# Altium PCB Adafruit PCA9685 rev C.PcbDoc
Units mil, origin at the board's own origin, x right, y up, seen from the top; angles counter-clockwise.
Board outline 2450 x 1000 mil, 2 copper layers (Top, Bottom), stack 61.811 mil thick; 40 components, 46 nets, 175 pads, 27 vias.
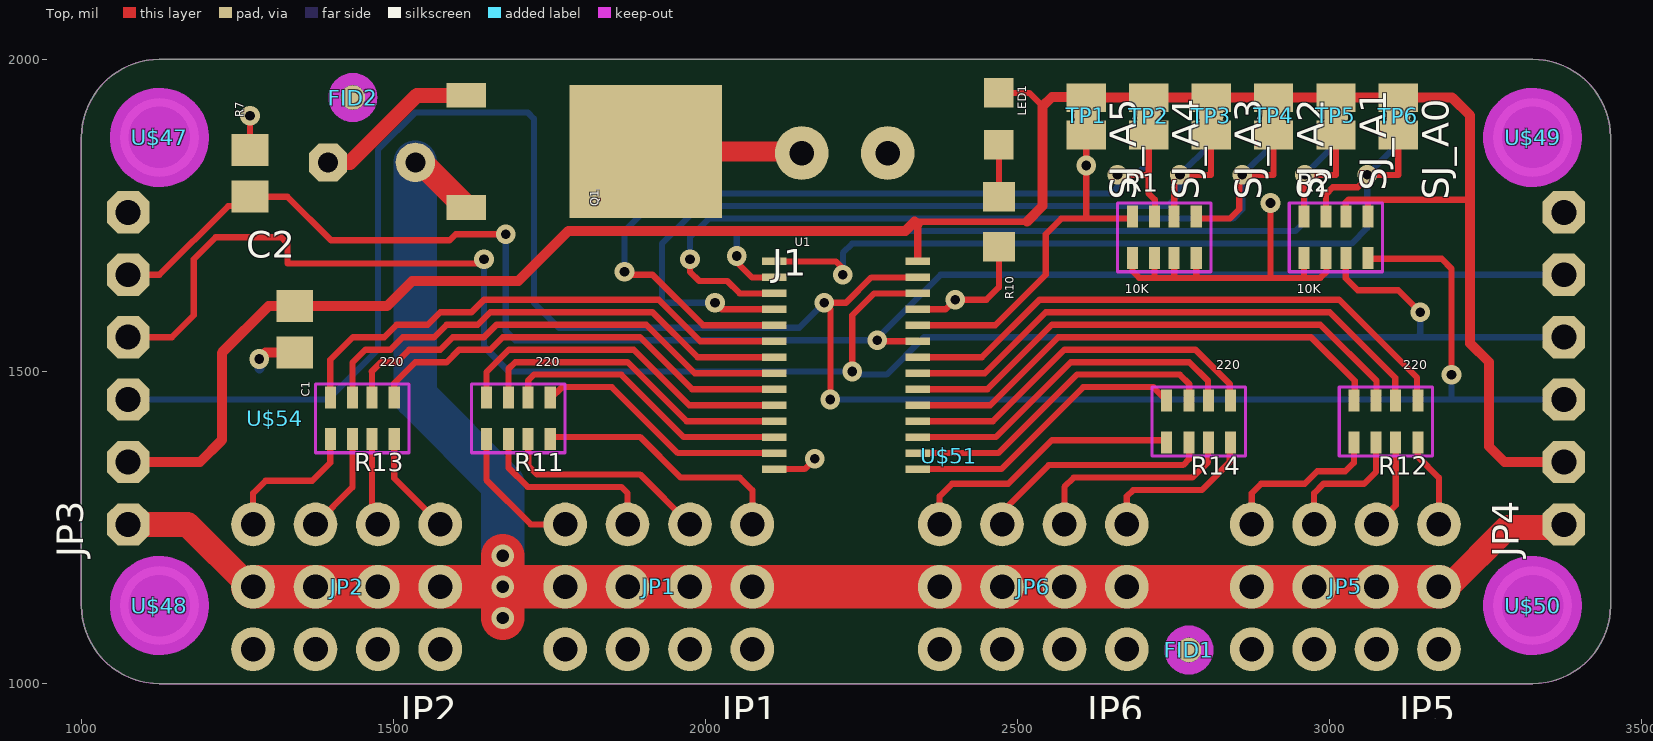
[diagram p0: Top view]
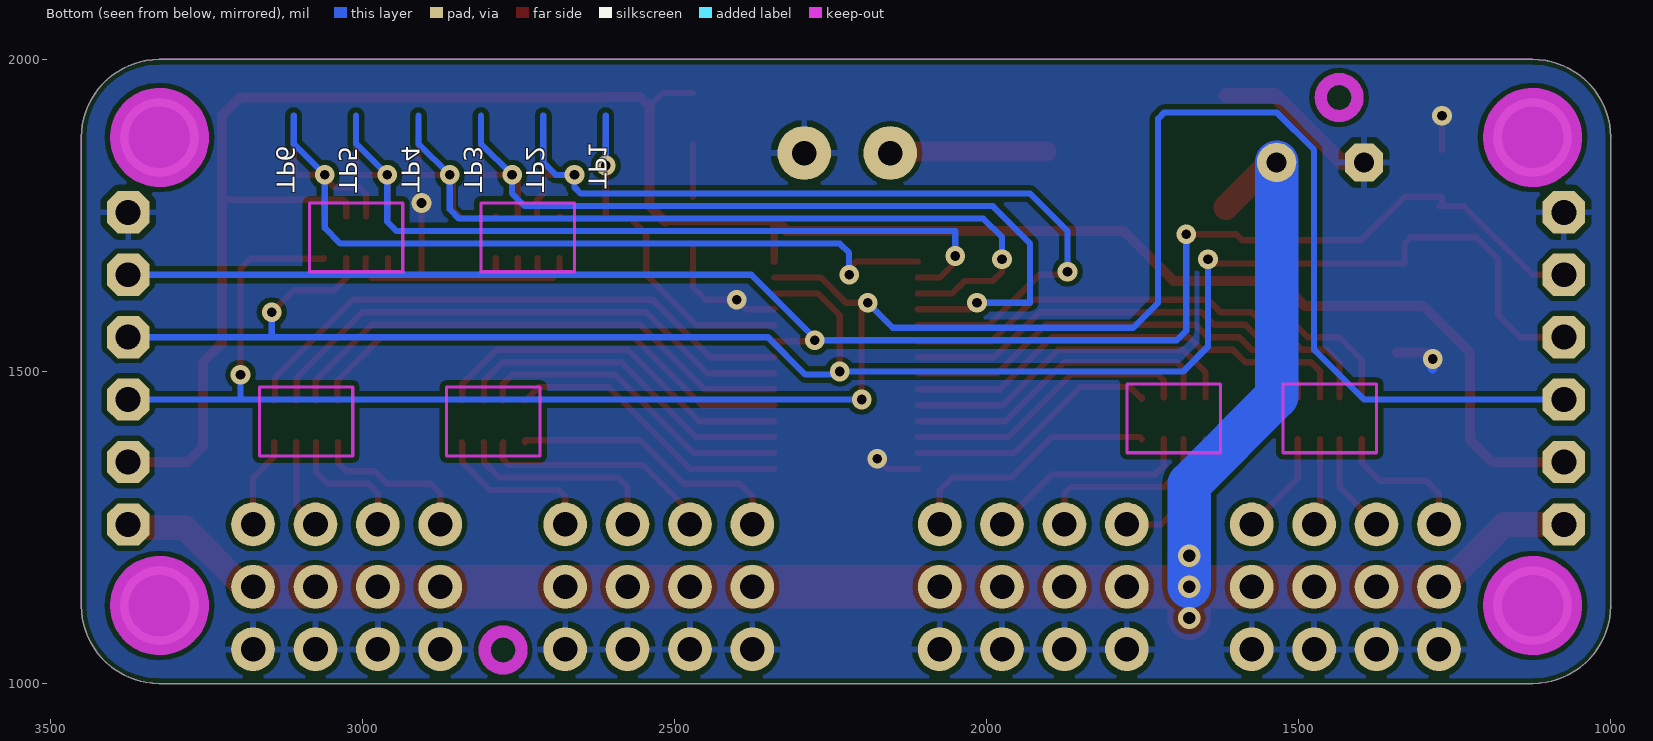
[diagram p1: Bottom view, seen from below]

## Layer stack, top to bottom
Top Solder: solder mask 0.4, Solder Resist, Dk 3.5
Top: signal copper 1.378
Dielectric 1: core 59.0551, FR-4, Dk 4.8
Bottom: signal copper 1.378
Bottom Solder: solder mask 0.4, Solder Resist, Dk 3.5

## Board outline
1125,1000 cw(c1125,1125) 1000,1125 1000,1875 cw(c1125,1875) 1125,2000 3325,2000 cw(c3325,1875) 3450,1875 3450,1125 cw(c3325,1125) 3325,1000

## Design rules (kind name [scope] priority, off if disabled: settings)
Clearance [All] p1: gap=8 ignorepadtopadclearanceinfootprint=FALSE except(0: SMDPad-SMDPad SMDPad-THPad SMDPad-Via)
Clearance "Clearance (Same Net)" [All] p2: gap=0 ignorepadtopadclearanceinfootprint=FALSE except(8: SMDPad-SMDPad SMDPad-THPad SMDPad-Via)
HoleSize HoleSize_1 [All] p1: absolutevalues=TRUE maxlimit=100000 minlimit=15.5 maxpercent=80.000 minpercent=20.000
HoleSize [All] p2: absolutevalues=TRUE maxlimit=100 minlimit=1 maxpercent=80.000 minpercent=20.000
HoleToHoleClearance mdViaViaSameLayer [All] p1: gap=8 allowstackedmicrovias=TRUE
HoleToHoleClearance [All] p2: gap=10 allowstackedmicrovias=TRUE
PasteMaskExpansion mlMinCreamFrame [All] p1: expansion=0
PasteMaskExpansion [All] p2: expansion=0
PolygonConnect ThermalVias [IsVia] p1: connectstyle=Direct reliefconductorwidth=10 reliefentries=4 polygonreliefangle="90 Angle" airgapwidth=10
PolygonConnect [All] p2: connectstyle=Relief reliefconductorwidth=10 reliefentries=4 polygonreliefangle="90 Angle" airgapwidth=10
RoutingVias [All] p1: holewidth=28 width=50 viastyle="Through Hole" minholewidth=28 minwidth=50 maxholewidth=28 maxwidth=50
SilkToSilkClearance [All] p1 off: silktosilkclearance=10
SilkToSolderMaskClearance [IsPad] p1 off: minsilkscreentomaskgap=10 clearancetoexposedcopper=TRUE
SolderMaskExpansion mlMinStopFrame [All] p1: expansion=2
SolderMaskExpansion [All] p2: expansion=4
Width Width_1 [All] p1: maxlimit=100000 minlimit=8 preferedwidth=10
Width [All] p2: maxlimit=10 minlimit=10 preferedwidth=10
25 further rules are at their usual default settings.

## Components (designator, comment, footprint, x,y, rotation, side; value= is the part's Value field where it differs from the comment)
C1 "10uF" 0805-NO 1341.87,1567.5 r270 top
C2 "" E3,5-8 1465,1835 r180 top
FID1 "" FIDUCIAL_1MM 2774.41,1053.74 r0 top
FID2 "" FIDUCIAL_1MM 1434.96,1938.94 r0 top
J1 "" TERMBLOCK_1X2-3.5MM 2225,1850 r180 top
JP1 "" 3X04 1925,1155 r180 top
JP2 "" 3X04 1425,1155 r180 top
JP3 "" 1X06-CLEANBIG 1075,1505 r90 top
JP4 "" 1X06-CLEANBIG 3375,1505 r90 top
JP5 "" 3X04 3025,1155 r180 top
JP6 "" 3X04 2525,1155 r180 top
LED1 "GREEN" CHIPLED_0805_NOOUTLINE 2470,1905 r180 top
Q1 "AOD417" TO252 1805.51,1852.56 r270 top
R1 "10K" RESPACK_4X0603 2735,1715 r0 top
R2 "10K" RESPACK_4X0603 3010,1715 r0 top
R7 "10K" 0805-NO 1270,1817.5 r90 top
R10 "470" _0805MP 2470,1740 r270 top
R11 "220" RESPACK_4X0603 1700,1425 r180 top
R12 "220" RESPACK_4X0603 3090,1420 r180 top
R13 "220" RESPACK_4X0603 1450,1425 r180 top
R14 "220" RESPACK_4X0603 2790,1420 r180 top
SJ_A0 "" SOLDERJUMPER_REFLOW_NOPASTE 3110,1908.74 r270 top
SJ_A1 "" SOLDERJUMPER_REFLOW_NOPASTE 3010,1908.74 r270 top
SJ_A2 "" SOLDERJUMPER_REFLOW_NOPASTE 2910,1908.74 r270 top
SJ_A3 "" SOLDERJUMPER_REFLOW_NOPASTE 2810,1908.74 r270 top
SJ_A4 "" SOLDERJUMPER_REFLOW_NOPASTE 2710,1908.74 r270 top
SJ_A5 "" SOLDERJUMPER_REFLOW_NOPASTE 2610,1908.74 r270 top
TP1 "" TESTPOINT_ROUND_1MM 2610,1910 r270 bottom
TP2 "" TESTPOINT_ROUND_1MM 2710,1910 r270 bottom
TP3 "" TESTPOINT_ROUND_1MM 2810,1910 r270 bottom
TP4 "" TESTPOINT_ROUND_1MM 2910,1910 r270 bottom
TP5 "" TESTPOINT_ROUND_1MM 3010,1910 r270 bottom
TP6 "" TESTPOINT_ROUND_1MM 3110,1910 r270 bottom
U1 "PCA9685" TSSOP28 2225,1510 r270 top
U$47 "" MOUNTINGHOLE_2.5_PLATED 1125,1875 r0 top
U$48 "" MOUNTINGHOLE_2.5_PLATED 1125,1125 r0 top
U$49 "" MOUNTINGHOLE_2.5_PLATED 3325,1875 r0 top
U$50 "" MOUNTINGHOLE_2.5_PLATED 3325,1125 r0 top
U$51 "" ADAFRUIT_5MM 2390,1365 r0 top
U$54 "" PCBFEAT-REV-040 1310,1425 r0 top

## Footprints (in the part's own frame and the unit in brackets; to place one, negate y for a bottom-side part, rotate by r counter-clockwise, add the part's x,y. Pads: shape width x height; smd on the part's side, far side on the other; paste and mask are expansions set on the pad)
1X06-CLEANBIG [mil] "1X06-CLEANBIG"
  oct 67.78x67.78 hole 40: 1(-250,0) 2(-150,0) 3(-50,0) 4(50,0) 5(150,0) 6(250,0)
3X04 [mil] "3X04"
  round 70 hole 39.37: 1(-150,-100) 2(-150,0) 3(-150,100) 4(-50,-100) 5(-50,0) 6(-50,100) 7(50,-100) 8(50,0) 9(50,100) 10(150,-100) 11(150,0) 12(150,100)
0805-NO [mil] "0805-NO"
  rect 51.18x59.06 smd: 1(-37.4,0) 2(37.4,0)
_0805MP [mil] "_0805MP"
  rect 47.24x51.18 smd: 1(-40,0) 2(40,0)
ADAFRUIT_5MM [mil] "ADAFRUIT_5MM"
CHIPLED_0805_NOOUTLINE [mil] "CHIPLED_0805_NOOUTLINE"
  rect 47.24x47.24 smd: A(0,-41.34) C(0,41.34)
E3,5-8 [mil] "E3,5-8"
  round 63 hole 32: +(-70,0)
  oct 61x61 hole 32: -(70,0)
FIDUCIAL_1MM [mm] "FIDUCIAL_1MM"
  rrect100% 1x1 smd paste-0.5: 1(0,0)
  Top keep-out lines w0.5: -0.75,0 cw(c0,0) 0,0.75 cw(c0,0) 0.75,0 cw(c0,0) 0,-0.75 cw(c0,0) -0.75,0
  Keep-Out Layer lines w0.5: -0.75,0 cw(c0,0) 0,0.75 cw(c0,0) 0.75,0 cw(c0,0) 0,-0.75 cw(c0,0) -0.75,0
MOUNTINGHOLE_2.5_PLATED [mil] "MOUNTINGHOLE_2.5_PLATED"
  round 125.98 hole 98.43: P$1(0,0)
  Top keep-out circle w80: c0,0 r39.37
  Bottom keep-out circle w80: c0,0 r39.37
  Keep-Out Layer circle w80: c0,0 r39.37
  Keep-Out Layer circle w80: c0,0 r39.37
PCBFEAT-REV-040 [mil] "PCBFEAT-REV-040"
RESPACK_4X0603 [mil] "RESPACK_4X0603"
  rect 17.72x35.43 smd: 1(-51.18,-33.46) 2(-15.75,-33.46) 3(15.75,-33.46) 4(51.18,-33.46) 5(51.18,33.46) 6(15.75,33.46) 7(-15.75,33.46) 8(-51.18,33.46)
  Keep-Out Layer lines w5: -74.8,-55.12 -74.8,55.12 74.8,55.12 74.8,-55.12 -74.8,-55.12
SOLDERJUMPER_REFLOW_NOPASTE [mil] "SOLDERJUMPER_REFLOW_NOPASTE"
  rect 46x63 smd paste-31.5: 1(-30,0) 2(30,0)
TERMBLOCK_1X2-3.5MM [mil] "TERMBLOCK_1X2-3.5MM"
  round 86 hole 39.37: 1(70.87,0) 2(-66.93,0)
TESTPOINT_ROUND_1MM [mm] "TESTPOINT_ROUND_1MM"
  rrect100% 1x1 smd far side paste-0.5: P$1(0,0)
TO252 [mm] "TO252"
  rect 1x1.6 smd: 1(-2.28,-4.8) 2(2.28,-4.8)
  rect 5.4x6.2 smd: 3(0,2.5)
TSSOP28 [mil] "TSSOP28"
  rect 12x39 smd: 1(-166.34,-114.87) 2(-140.75,-114.87) 3(-115.16,-114.87) 4(-89.57,-114.87) 5(-63.98,-114.87) 6(-38.39,-114.87) 7(-12.8,-114.87) 8(12.8,-114.87) 9(38.39,-114.87) 10(63.98,-114.87) 11(89.57,-114.87) 12(115.16,-114.87) 13(140.75,-114.87) 14(166.34,-114.87) 15(166.34,114.87) 16(140.75,114.87) 17(115.16,114.87) 18(89.57,114.87) 19(63.98,114.87) 20(38.39,114.87) 21(12.8,114.87) 22(-12.8,114.87) 23(-38.39,114.87) 24(-63.98,114.87) 25(-89.57,114.87) 26(-115.16,114.87) 27(-140.75,114.87) 28(-166.34,114.87)

## Part data
C1 R7: library part 0805-NO
C2: library part E3,5-8
FID1 FID2: library part FIDUCIAL_1MM
J1: library part TERMBLOCK_1X2-3.5MM
JP1 JP2 JP5 JP6: library part 3X04
JP3 JP4: library part 1X06-CLEANBIG
LED1: library part CHIPLED_0805_NOOUTLINE
Q1: library part TO252
R1 R2 R11 R12 R13 R14: library part RESPACK_4X0603
R10: library part _0805MP
SJ_A0 SJ_A1 SJ_A2 SJ_A3 SJ_A4 SJ_A5: library part SOLDERJUMPER_REFLOW_NOPASTE
TP1 TP2 TP3 TP4 TP5 TP6: library part TESTPOINT_ROUND_1MM
U1: library part TSSOP28
U$47 U$48 U$49 U$50: library part MOUNTINGHOLE_2.5_PLATED
U$51: library part ADAFRUIT_5MM
U$54: library part PCBFEAT-REV-040

## Via types
v1: diameter 31.5/31.5 (per signal layer), hole 15.5, Top to Bottom, 24 vias
v2: diameter 35.69/35.69 (per signal layer), hole 19.69, Top to Bottom, 3 vias

## Nets (pads, with @x,y where several pads share a name; then routed paths per layer and width w, separated by ;. In a path a pad name is that pad's centre, name@x,y a point inside that pad or via, vN(x,y) a via of type N, cw(c..) or ccw(c..) an arc to the next point about the centre after c; other vN are vias at no path point)
5.0V: C2.+ JP1.2 JP1.5 JP1.8 JP1.11 JP2.2 JP2.5 JP2.8 JP2.11 JP3.1 JP4.1 JP5.2 JP5.5 JP5.8 JP5.11 JP6.2 JP6.5 JP6.8 JP6.11 Q1.2 | length 3332.3
  Top w10: JP2.11@1270,1155 JP2.11 ; JP5.2 JP5.2@3190,1155
  Top w40: JP3.1 1170,1255 JP2.11@1270,1155 ; C2.+ 1544.33,1835 Q1.2 ; JP5.2@3190,1155 3285,1250 3370,1250 JP4.1
  Top w70: JP2.11 JP2.8 JP2.5 JP2.2 v2(1675,1155) ; v2(1675,1105) v2(1675,1155) ; v2(1675,1205) v2(1675,1155) ; JP5.2 JP5.5 JP5.8 JP5.11 JP6.2 JP6.5 JP6.8 JP6.11 JP1.2 JP1.5 JP1.8 JP1.11 v2(1675,1155)
  Bottom w70: C2.+ 1535,1460 1675,1320 v2(1675,1155)
A0: R2.7 SJ_A0.2 TP6.P$1 U1.1 | length 1447.8
  Top w10: U1.1 2208.66,1676.34 2220,1665 v1(2220,1655) ; R2.7 2994.25,1784.25 3005,1795 3045,1795 3060,1810 v1(3060,1815) 3110,1815 SJ_A0.2
  Bottom w10: v1(2220,1655) 2220,1690 2235,1705 3035,1705 3060,1730 v1(3060,1815) 3110,1865 3110,1910
A1: R2.8 SJ_A1.2 TP5.P$1 U1.2 | length 1407.9
  Top w10: v1(2050,1685) 2050,1675 2074.25,1650.75 U1.2 ; R2.8 2958.82,1813.82 v1(2960,1815) 3010,1815 SJ_A1.2
  Bottom w10: v1(2050,1685) 2050,1725 2945,1725 2960,1740 v1(2960,1815) 3010,1865 3010,1910
A2: R1.5 SJ_A2.2 TP4.P$1 U1.3 | length 1526.2
  Top w10: v1(1975,1680) 1975,1660 1990,1645 2035,1645 2054.84,1625.16 U1.3 ; R1.5 2789.65,1745 2840,1745 2855,1760 2855,1810 v1(2860,1815) 2910,1815 SJ_A2.2
  Bottom w10: v1(1975,1680) 1975,1715 2005,1745 2845,1745 2860,1760 v1(2860,1815) 2910,1865 2910,1910
A3: R1.6 SJ_A3.2 TP3.P$1 U1.4 | length 1472.4
  Top w10: v1(2015,1610) 2025.43,1599.57 U1.4 ; R1.6 2750.75,1805.75 v1(2760,1815) 2810,1815 SJ_A3.2
  Bottom w10: v1(2015,1610) 1930,1610 1930,1705 1990,1765 2740,1765 2760,1785 v1(2760,1815) 2810,1865 2810,1910
A4: R1.7 SJ_A4.2 TP2.P$1 U1.5 | length 1497.8
  Top w10: v1(1870,1660) 1875,1655 1915,1655 1996.02,1573.98 U1.5 ; v1(2660,1815) 2710,1815 ; SJ_A4.2 2710,1815 ; R1.7 2720,1749.21 2720,1775 2710,1785 2710,1815
  Bottom w10: v1(1870,1660) 1870,1725 1930,1785 2650,1785 2660,1795 v1(2660,1815) 2690,1815 2710,1835 2710,1910
A5: R1.8 SJ_A5.2 TP1.P$1 U1.24 | length 668
  Top w10: U1.24 2463.98,1573.98 2545,1655 2545,1720 2570,1745 2610,1745 ; SJ_A5.2 v1(2610,1830) 2610,1745 ; R1.8 2680.35,1745 2610,1745
  Bottom w10: v1(2610,1830) 2610,1910
GND: C1.2 C2.- J1.2 JP1.3 JP1.6 JP1.9 JP1.12 JP2.3 JP2.6 JP2.9 JP2.12 JP3.6 JP4.6 JP5.3 JP5.6 JP5.9 JP5.12 JP6.3 JP6.6 JP6.9 JP6.12 Q1.1 R1.1 R1.2 R1.3 R1.4 R2.1 R2.2 R7.2 R10.2 U1.14 U1.25 | length 1299.6
  Top w10: R7.2 v1(1270,1910) ; U1.14 2158.66,1343.66 v1(2175,1360) ; U1.25 2384.57,1599.57 v1(2400,1615) 2450,1615 2470,1635 R10.2 ; R1.1 2683.82,1661.18 2695,1650 2720,1650 ; R1.2 2719.25,1650.75 2720,1650 ; R1.3 2750.75,1650.75 2750,1650 ; R1.4 2786.18,1653.82 2790,1650 ; v1(2905,1770) 2905,1650 ; R2.1 2958.82,1651.18 2960,1650 ; R2.2 2995,1680.79 2995,1660 2985,1650 2960,1650 ; 2720,1650 2750,1650 ; 2750,1650 2790,1650 ; 2790,1650 2905,1650 ; 2905,1650 2960,1650
  Top w16: v1(1285,1520) 1295.1,1530.1 C1.2
  Top w24: C2.- 1430,1835 1537.32,1942.32 Q1.1
  Bottom w10: v1(2400,1615) v1@2410,1615
  Bottom w16: v1@1285,1505 v1(1285,1520)
N$1: LED1.C R10.1 | length 83.7
  Top w10: R10.1 LED1.C
N$2: JP1.4 R11.7 | length 341.2
  Top w10: R11.7 1715.75,1350.75 1715,1350 1730,1335 1895,1335 JP1.4
N$3: JP1.1 R11.8 | length 415.5
  Top w10: R11.8 1754.65,1395 1895,1395 1960,1330 2055,1330 2075,1310 JP1.1
N$4: JP1.7 R11.6 | length 303.4
  Top w10: R11.6 1684.25,1345.75 1715,1315 1865,1315 1875,1305 JP1.7
N$5: JP1.10 R11.5 | length 221
  Top w10: R11.5 1648.82,1326.18 1720,1255 JP1.10
N$6: JP2.1 R13.8 | length 167.1
  Top w10: R13.8 1501.18,1328.82 JP2.1
N$7: JP2.4 R13.7 | length 140.4
  Top w10: R13.7 1465.75,1264.25 JP2.4
N$8: JP2.7 R13.6 | length 161.1
  Top w10: JP2.7 1434.25,1314.25 R13.6
N$9: JP2.10 R13.5 | length 231.8
  Top w10: JP2.10 1275,1305 1295,1325 1370,1325 1398.82,1353.82 R13.5
N$10: JP6.10 R14.5 | length 449.6
  Top w10: JP6.10 2375,1300 2395,1320 2485,1320 2555,1390 2738.82,1390 R14.5
N$11: JP6.7 R14.6 | length 382.1
  Top w10: JP6.7 2475,1275 2550,1350 2765,1350 2775,1360 2775,1385.79 R14.6
N$12: JP6.4 R14.7 | length 338.4
  Top w10: JP6.4 2575,1315 2590,1330 2780,1330 2805,1355 2805,1385.79 R14.7
N$13: JP6.1 R14.8 | length 264.8
  Top w10: JP6.1 2675,1300 2685,1310 2795,1310 2840,1355 2840,1385.35 R14.8
N$14: JP5.10 R12.5 | length 266.8
  Top w10: JP5.10 2875,1305 2890,1320 2960,1320 2980,1340 3025,1340 3038.82,1353.82 R12.5
N$15: JP5.7 R12.6 | length 210.7
  Top w10: JP5.7 2975,1305 2990,1320 3055,1320 3074.25,1339.25 R12.6
N$16: JP5.4 R12.7 | length 144.3
  Top w10: JP5.4 3105.75,1285.75 R12.7
N$17: JP5.1 R12.8 | length 145.5
  Top w10: R12.8 3141.18,1363.82 3175,1330 JP5.1
OE: JP3.5 JP4.5 R7.1 U1.23 | length 2683.5
  Top w10: JP3.5 1125,1655 1235,1765 R7.1@1270,1765 ; R7.1@1274.9,1765 R7.1@1270,1765 ; v1(1680,1720) 1599.8,1720 1589.9,1710.1 1399.9,1710.1 1330,1780 1270,1780 R7.1 R7.1@1270,1765 ; v1(2275,1550) 2276.61,1548.39 U1.23
  Bottom w10: v1(1680,1720) 1680,1565 1695,1550 v1(2275,1550) 2276.61,1548.39 2270,1548.39 2376.61,1655 JP4.5
PWM0: R13.4 U1.6 | length 839.1
  Top w10: R13.4 1398.82,1518.82 1435,1555 1485,1555 1505,1575 1555,1575 1575,1595 1625,1595 1645,1615 1925,1615 1991.61,1548.39 U1.6
PWM1: R13.3 U1.7 | length 795
  Top w10: R13.3 1434.25,1514.25 1455,1535 1495,1535 1515,1555 1565,1555 1585,1575 1635,1575 1655,1595 1915,1595 1987.2,1522.8 U1.7
PWM2: R13.2 U1.8 | length 750.3
  Top w10: R13.2 1465.75,1499.25 1465,1500 1480,1515 1505,1515 1525,1535 1575,1535 1595,1555 1645,1555 1665,1575 1905,1575 1982.8,1497.2 U1.8
PWM3: R13.1 U1.9 | length 696.8
  Top w10: R13.1 1501.18,1481.18 1535,1515 1585,1515 1605,1535 1655,1535 1675,1555 1895,1555 1978.39,1471.61 U1.9
PWM4: R11.4 U1.10 | length 553.5
  Top w10: R11.4 1648.82,1498.82 1685,1535 1885,1535 1973.98,1446.02 U1.10
PWM5: R11.3 U1.11 | length 515.3
  Top w10: R11.3 1684.25,1504.25 1695,1515 1875,1515 1969.57,1420.43 U1.11
PWM6: R11.2 U1.12 | length 467
  Top w10: R11.2 1715.75,1485.75 1725,1495 1865,1495 1965.16,1394.84 U1.12
PWM7: R11.1 U1.13 | length 412.8
  Top w10: R11.1 1751.18,1456.18 1770,1475 1850,1475 1955.75,1369.25 U1.13
PWM8: R14.4 U1.15 | length 462.3
  Top w10: U1.15 2473.66,1343.66 2605,1475 2717.28,1475 R14.4
PWM9: R14.3 U1.16 | length 520.3
  Top w10: U1.16 2469.25,1369.25 2595,1495 2760,1495 2775,1480 2775,1454.21 R14.3
PWM10: R14.2 U1.17 | length 559.2
  Top w10: U1.17 2464.84,1394.84 2585,1515 2775,1515 2805,1485 2805,1454.21 R14.2
PWM11: R14.1 U1.18 | length 597.4
  Top w10: U1.18 2460.43,1420.43 2575,1535 2785,1535 2840,1480 2840,1454.65 R14.1
PWM12: R12.4 U1.19 | length 806.3
  Top w10: U1.19 2456.02,1446.02 2565,1555 2970,1555 3040,1485 3040,1454.65 R12.4
PWM13: R12.3 U1.20 | length 847.1
  Top w10: U1.20 2451.61,1471.61 2555,1575 2985,1575 3075,1485 3075,1454.21 R12.3
PWM14: R12.2 U1.21 | length 886
  Top w10: U1.21 2447.2,1497.2 2545,1595 3000,1595 3105,1490 3105,1454.21 R12.2
PWM15: R12.1 U1.22 | length 927.1
  Top w10: U1.22 2442.8,1522.8 2535,1615 3015,1615 3140,1490 3140,1454.65 R12.1
PWRIN: J1.1 Q1.3 | length 251.3
  Top w32: Q1.3 2151.57,1852.56 J1.1
SCL: JP3.4 JP4.4 R2.3 U1.26 | length 3067
  Top w10: JP3.4 1145,1555 1180,1590 1180,1680 1215,1715 1320,1715 1330,1705 1330,1673.03 1638.03,1673.03 v1(1645,1680) ; v1(2235,1500) 2235,1590 2270.16,1625.16 U1.26 ; R2.3 3025.75,1649.25 3045,1630 3110,1630 v1(3145,1595)
  Bottom w10: v1(1645,1680) 1645,1540 1685,1500 v1(2235,1500) 2240,1495 2290,1495 2350,1555 3140,1555 ; v1(3145,1595) 3145,1560 3140,1555 ; JP4.4 3140,1555
SDA: JP3.3 JP4.3 R2.4 U1.27 | length 3676.8
  Top w10: v1(2200,1455) 2200,1600 v1(2190,1610) 2225,1610 2265.75,1650.75 U1.27 ; R2.4 3062.24,1680.47 3179.53,1680.47 3195,1665 v1(3195,1495)
  Bottom w10: JP3.3 1395,1455 1475,1535 1475,1855 1535,1915 1715,1915 1725,1905 1725,1610 1765,1570 2150,1570 v1(2190,1610) ; v1(2200,1455) 3195,1455 ; v1(3195,1495) 3195,1455 ; JP4.3 3195,1455
VCC: C1.1 JP3.2 JP4.2 LED1.A R2.5 R2.6 SJ_A0.1 SJ_A1.1 SJ_A2.1 SJ_A3.1 SJ_A4.1 SJ_A5.1 U1.28 | length 3650.3
  Top w10: 2335,1740 2515,1740 ; LED1.A 2518.66,1946.34 2540,1925 ; R2.6 3025.75,1770.75 3030,1775 3060,1775 ; R2.5 3061.18,1773.82 3060,1775 ; 3225,1770 3220,1775 3060,1775
  Top w12: U1.28 2339.87,1735.13
  Top w16: JP3.2 1190,1355 1225,1390 1225,1530 1300,1605 C1.1@1341.97,1605 ; C1.1 C1.1@1341.97,1605 ; 2339.87,1735.13 2335,1740 2320,1725 1780,1725 1700,1645 1530,1645 1490,1605 C1.1@1341.97,1605 ; 2515,1740 2540,1765 2540,1925 2555,1940 2608.74,1940 SJ_A5.1 SJ_A4.1 SJ_A3.1 SJ_A2.1 SJ_A1.1 SJ_A0.1 3196.26,1938.74 3225,1910 3225,1770 3225,1545 3255,1515 3255,1380 3280,1355 JP4.2
pads on no net: FID1.1 FID2.1 U$47.P$1 U$48.P$1 U$49.P$1 U$50.P$1

## Polygon pours and split planes (outlines as drawn)
GND on Bottom "Bottom-GND" (solid, remove dead copper, pour order 0): 995,995 995,2026.1 3476.57,2026.1 3476.57,995

## Keep-outs
Keep-Out Layer:
  the board outline again, w0

## Silkscreen, mask and mechanical layers (free items; w line width, h text height)
Dimension:
  the board outline again, w0
Top Assembly:
  text "V+" at 2076.34,1806.57 h62 r90
  text "GND" at 2411.34,1800.32 h62 r90
  text "1+" at 2500,1795 h62
  text "A5" at 2575,1795 h62
  text "A4" at 2675,1795 h62
  text "A3" at 2775,1795 h62
  text "A2" at 2875,1795 h62
  text "A1" at 2975,1795 h62
  text "A0" at 3075,1795 h62
  text "+RW" at 3150,1795 h62
  text "GND" at 1125,1735 h62
  text "GND" at 3217.62,1735.25 h62
  text "C2" at 1450,1710 h77.5
  text "OE" at 1125,1640 h62
  text "POWER" at 1890,1635 h62
  text "OE" at 3265.49,1635.25 h62
  text "PCA9685" at 1520,1600 h42.5
  text "I2C Address" at 2610,1578.74 h77.5
  text "SCL" at 1125,1540 h62
  text "SCL" at 3236.59,1535.25 h62
  text "(Open=0/Closed=1)" at 2550,1528.74 h62
  text "16 x 12-bit PWM" at 1385,1525 h42.5
  text "SDA" at 1120,1435 h62
  text "SDA" at 3223.39,1435.25 h62
  text "adafruit!" at 1810,1425 h34
  text "VCC" at 1120,1335 h62
  text "VCC" at 3225.32,1335.25 h62
  text "0" at 1264.37,1315 h62
  text "1" at 1364.37,1315 h62
  text "2" at 1464.37,1315 h62
  text "3" at 1564.37,1315 h62
  text "4" at 1764.37,1315 h62
  text "5" at 1864.37,1315 h62
  text "6" at 1964.37,1315 h62
  text "7" at 2054.37,1315 h62
  text "8" at 2369.37,1315 h62
  text "9" at 2459.37,1315 h62
  text "10" at 2544.37,1315 h62
  text "11" at 2644.37,1315 h62
  text "12" at 2844.37,1315 h62
  text "13" at 2939.37,1315 h62
  text "14" at 3044.37,1315 h62
  text "15" at 3139.37,1315 h62
  text "V+" at 1120,1235 h62
  text "PWM" at 2164.37,1235 h77.5
  text "V+" at 3268.93,1230.28 h62
  text "V+" at 2184.37,1135 h77.5
  text "GND" at 2164.37,1035 h77.5
Bottom Assembly:
  text "PCA9685" at 2381.36,1911.31 h86.8
  text "16-Channel 12-Bit PWM Driver" at 2748.28,1731.31 h86.8
  text "Use V+ for servo supply" at 2845,1655 h86.8
  text "3-5V" at 2720,1575 h86.8
  text "VCC:" at 3035,1575 h86.8
  text "Terminal block is" at 2125,1545 h86.8
  text "3-5V" at 2720,1485 h86.8
  text "Logic:" at 3035,1485 h86.8
  text "reverse polarity" at 2125,1470 h77.5
  text "protected. Side breakout" at 2125,1395 h77.5
  text "6V Max" at 2720,1395 h86.8
  text "V+:" at 3040,1395 h86.8
  text "pins are not!" at 2125,1320 h77.5
  text "40-1000Hz" at 2720,1305 h86.8
  text "Freq.:" at 3035,1305 h86.8
Assembly Text Top:
  text "10K" at 2960,1610 h62
  text "10K" at 2690,1600 h62
  text "220 ohm" at 1535,1495 h62
  text "220 ohm" at 2815,1495 h62

## Dimensions
1000,1565 to 3450,1485 on Measures
1000,1500 to 1075,1505 on Measures
1000,1725 to 1125,1875 on Measures
1000,1245 to 1425,1155 on Measures
1425,1155 to 1925,1155 on Measures
1925,1155 to 2525,1155 on Measures
2525,1150 to 3025,1155 on Measures
1000,1195 to 3325,1870 on Measures
1000,1805 to 2225,1850 on Measures
3230,1000 to 3025,1155 on Measures
3095,1000 to 3375,1505 on Measures
1170,1000 to 1125,1125 on Measures
1235,1000 to 1125,1875 on Measures

## Text inside footprints (layer, text, board x,y; h text height)
LED1: Assembly Top "A" at 2464.65,1950.19 h15.5; Assembly Top "C" at 2465.16,1847.83 h15.5
U$54: Top Assembly ">REV" at 1296,1405 h62